# Altium PCB PCB.PcbDoc
Units mm, origin at the board's own origin, x right, y up, seen from the top; angles counter-clockwise.
Board outline 41 x 25.36 mm, 2 copper layers (TOP, BOTTOM), stack 1.586 mm thick; 36 components, 21 nets, 107 pads, 50 vias.
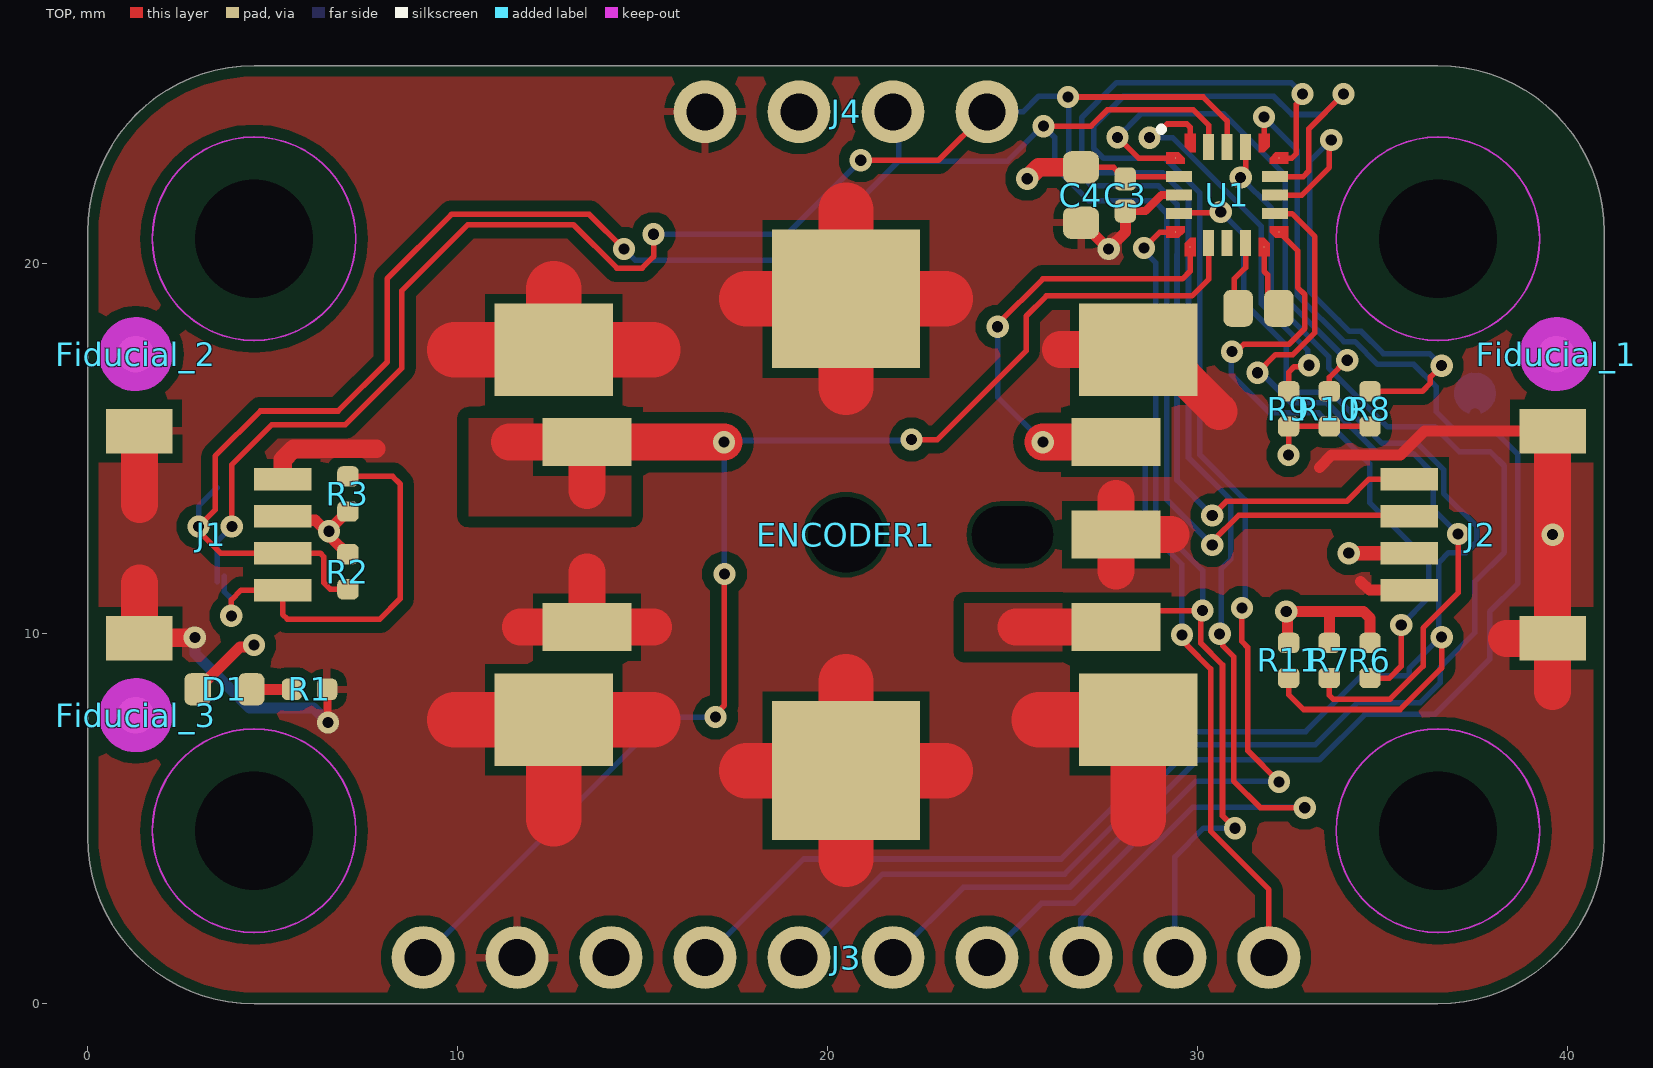
[diagram p0: TOP view]
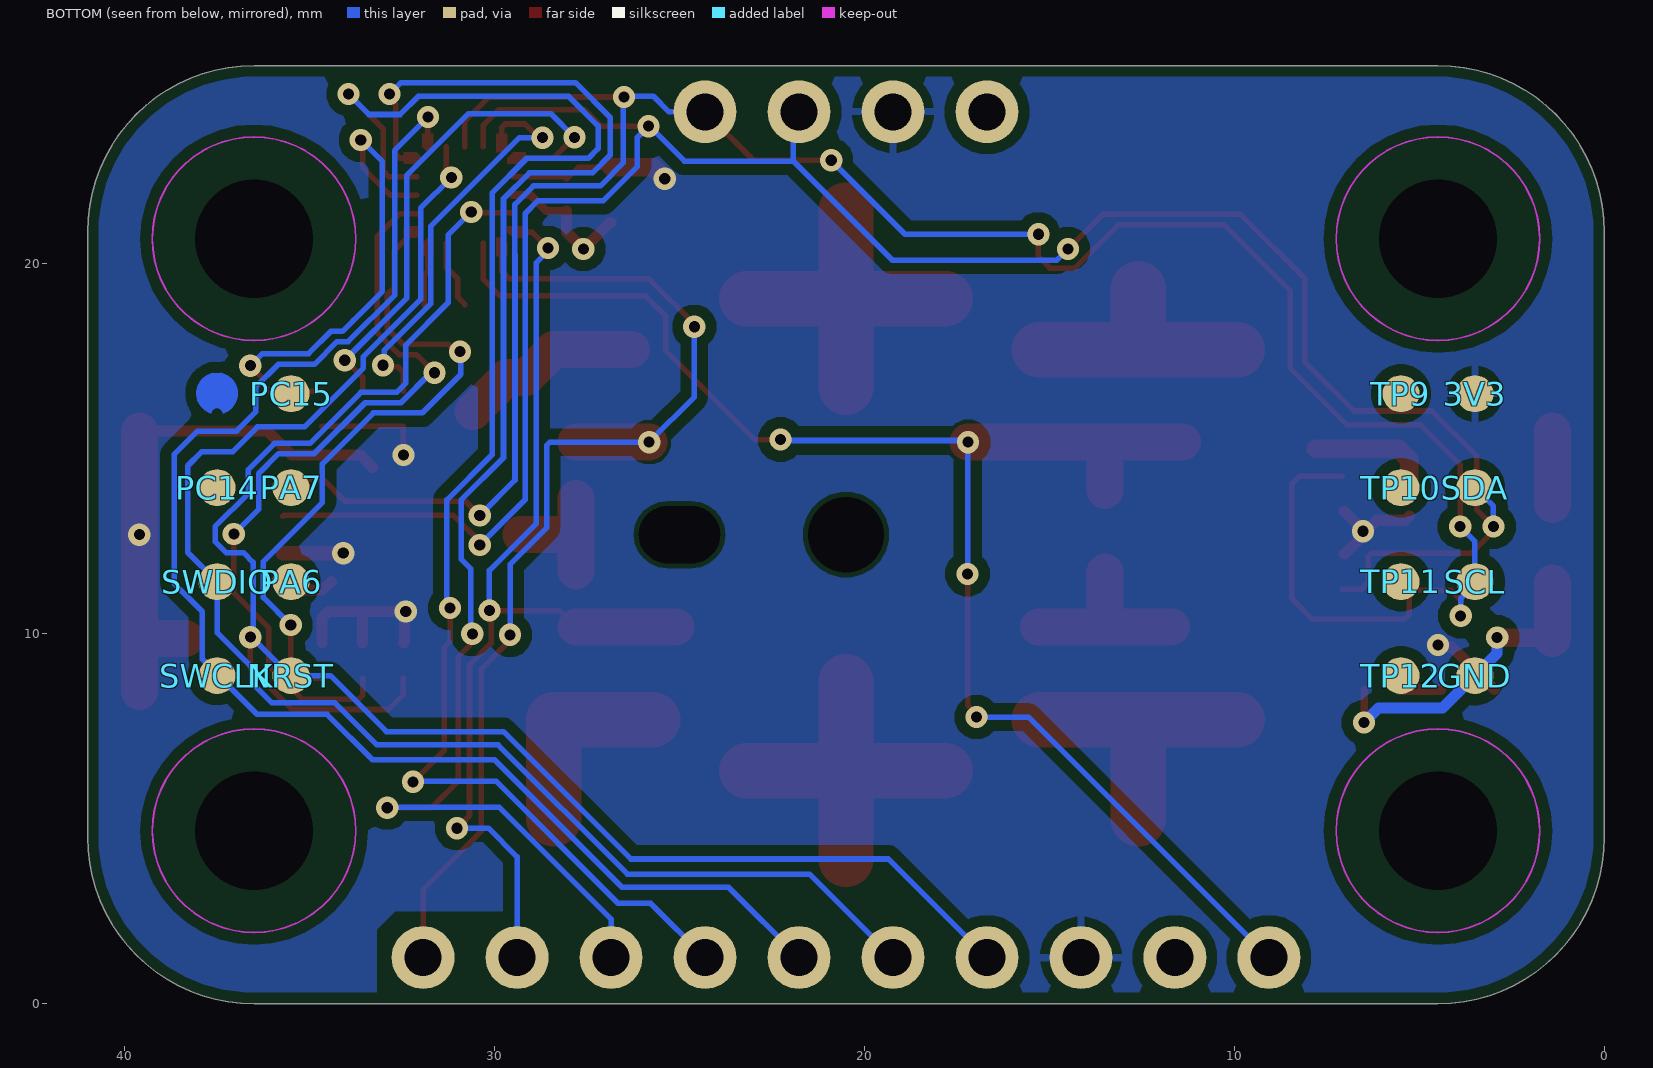
[diagram p1: BOTTOM view, seen from below]
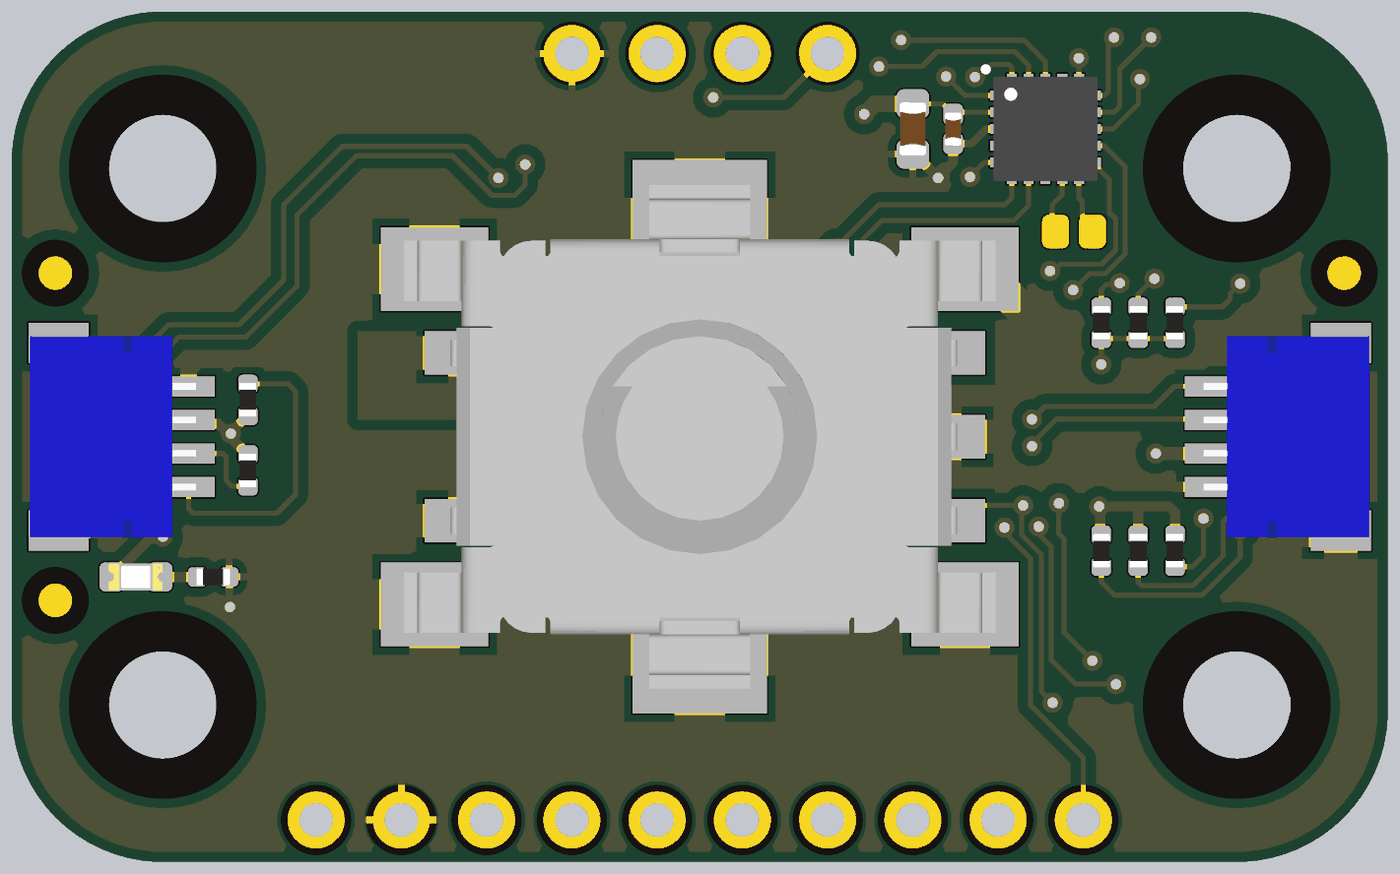
[diagram p2: 3D render of the assembled board from above, using the file's embedded part models]

## Layer stack, top to bottom
Top Solder: solder mask 0.01, Solder Resist, Dk 3.5
TOP: signal copper 0.018
Dielectric: core 1.55, FR-4, Dk 4.8
BOTTOM: signal copper 0.018
Bottom Solder: solder mask 0.01, Solder Resist, Dk 3.5

## Board outline
0,4.5 ccw(c4.5,4.5) 4.5,0 36.5,0 ccw(c36.5,4.5) 41,4.5 41,20.86 ccw(c36.5,20.86) 36.5,25.36 4.5,25.36 ccw(c4.5,20.86) 0,20.86

## Design rules (kind name [scope] priority, off if disabled: settings)
BoardOutlineClearance Version [(ObjectKind = 'Text') And (StringText = '.Version')] p1: gap=0 ignorepadtopadclearanceinfootprint=FALSE
BoardOutlineClearance Mousebites [(ObjectKind = 'Pad') And (Name = 'Free-MOUSEBITE')] p2: gap=0 ignorepadtopadclearanceinfootprint=FALSE
BoardOutlineClearance Silks [(OnLayer('Top Overlay') OR OnLayer('Bottom Overlay'))] p3: gap=0 ignorepadtopadclearanceinfootprint=FALSE
BoardOutlineClearance [All] p4: gap=0.3 ignorepadtopadclearanceinfootprint=FALSE
Clearance COPPER_0.3mm [All] p1: gap=0.127 ignorepadtopadclearanceinfootprint=FALSE except(0.3: Arc-Fill Arc-Poly Arc-Region Track-Fill Track-Poly Track-Region SMDPad-Fill SMDPad-Poly SMDPad-Region THPad-Fill THPad-Poly THPad-Region Via-Fill Via-Poly Via-Region Fill-Fill Fill-Poly Fill-Region Poly-Poly Poly-Region Region-Region)
Clearance "Generic clearance 0.15mm" [All] p2: gap=0.15 ignorepadtopadclearanceinfootprint=FALSE
ComponentClearance [All] p1: gap=0.2 collisioncheckmode=3 verticalgap=0 showdistances=TRUE
DiffPairsRouting USB [InDifferentialPairClass('USB')] p1: maxlimit=0.15 minlimit=0.15 mostfreqgap=0.15 toplayer_minwidth=0.15 toplayer_maxwidth=0.21 toplayer_prefwidth=0.2 bottomlayer_minwidth=0.15 bottomlayer_maxwidth=0.21 bottomlayer_prefwidth=0.2 impedanceprofiledriven=TRUE impedanceprofileid={E6B00C31-4C8E-439C-824F-D2B2CDC26F9C} impedanceprofilevalue=90.000000 maxuncoupledlength=12.7
Height [All] p1: minheight=0 maxheight=30 prefheight=12.7
HoleSize [All] p1: absolutevalues=TRUE maxlimit=30 minlimit=0.3 maxpercent=80.000 minpercent=20.000
HoleToHoleClearance [All] p1: gap=0.25 allowstackedmicrovias=FALSE
MinimumAnnularRing [All] p1: minimumring=0.15
PlaneConnect [All] p1: pad.planeconnectstyle=Relief pad.reliefexpansion=0.508 pad.reliefentries=4 pad.reliefconductorwidth=0.254 pad.reliefairgap=0.254 via.planeconnectstyle=Direct via.reliefexpansion=0.508 via.reliefentries=4 via.reliefconductorwidth=0.254 via.reliefairgap=0.254
PolygonConnect [All] p1: thpad.connectstyle=Relief thpad.reliefconductorwidth=0.2 thpad.reliefentries=4 thpad.polygonreliefangle="90 Angle" thpad.airgapwidth=0.254 smdpad.connectstyle=Relief smdpad.reliefconductorwidth=0.2 smdpad.reliefentries=4 smdpad.polygonreliefangle="90 Angle" smdpad.airgapwidth=0.254 via.connectstyle=Direct via.reliefconductorwidth=0.254 via.reliefentries=4 via.polygonreliefangle="90 Angle" via.airgapwidth=0.254
RoomDefinition TOP [InComponentClass('TOP')] p1: confinementstyle=ConfineIn formatcopy=TRUE lockcomponents=FALSE outline 42.8,3.6 51.5,3.6 51.5,18.3 42.8,18.3
RoutingVias StandardVias [All] p1: holewidth=0.3 width=0.6 viastyle="Through Hole" minholewidth=0.3 minwidth=0.6 maxholewidth=0.3 maxwidth=0.6
SMDToCorner [All] p1: distance=39370
SilkToSilkClearance [All] p1: silktosilkclearance=0.2
SilkToSolderMaskClearance [IsPad] p1: minsilkscreentomaskgap=0.15 clearancetoexposedcopper=TRUE
SolderMaskExpansion VIAtented [IsVia] p1: expansion=0.102 istentingtop=TRUE
SolderMaskExpansion [All] p2: expansion=0.05 istentingtop=FALSE
UnConnectedPin [All] p1:
UnRoutedNet [not WithinRoom('K36')] p1: checkbadconnections=TRUE
ViasUnderSMD [All] p1: allowed=FALSE
Width StandardTraces [All] p1: maxlimit=5 minlimit=0.15 preferedwidth=0.15 minimp=50.000000 maximp=50.000000 favimp=50.000000
21 further rules are at their usual default settings.

## Classes and differential pairs
component class TOP: 3V3 D1 ENCODER1 Fiducial_1 Fiducial_2 Fiducial_3 GND J1 J2 J3 J4 NRST PA6 PA7 PC14 PC15 R1 SCL SDA SWCLK SWDIO TP9 TP10 TP11 TP12
component class U_MICROCONTROLLER: C3 C4 R2 R3 R6 R7 R8 R9 R10 R11 U1

## Components (designator, comment, footprint, x,y, rotation, side; value= is the part's Value field where it differs from the comment)
3V3 "Test point 1.00mm" TP-1.00MM 3.5,16.49 r90 bottom
C3 "0402B104K160CT" CAP-0402 28.05,21.86 r270 top value=100nF
C4 "GRM188R61C475KAAJD" CAP-0603 26.85,21.86 r90 top value=4.7µF
D1 "HSMG-C190" LEDC1608X80N-AK 3.7,8.5 r180 top
ENCODER1 "PEC11J-9215F-S0015" PEC11J-9215F-S0015 20.5,12.68 r90 top
Fiducial_1 "Fiducial mark 1mm" "Fiducial mark 1mm-Footprint-1" 39.7,17.56 r270 top
Fiducial_2 "Fiducial mark 1mm" "Fiducial mark 1mm-Footprint-1" 1.3,17.56 r270 top
Fiducial_3 "Fiducial mark 1mm" "Fiducial mark 1mm-Footprint-1" 1.3,7.8 r270 top
GND "Test point 1.00mm" TP-1.00MM 3.5,8.87 r90 bottom
J1 "SM04B-SRSS-TB(LF)(SN)" SM04B-SRSS-TB(LF)(SN)-Footprint-1 3.337,12.68 r90 top locked
J2 "SM04B-SRSS-TB(LF)(SN)" SM04B-SRSS-TB(LF)(SN)-Footprint-1 37.663,12.68 r270 top locked
J3 "HEADER TH 2.54mm VERT. 1x010POS" "PIN HEADER 2.54mm VERT. 1x10POS" 20.5,1.25 r0 top
J4 "HEADER TH 2.54mm VERT. 1x004POS" "PIN HEADER 2.54mm VERT. 1x4POS-Footprint-1" 20.5,24.11 r0 top
NRST "Test point 1.00mm" TP-1.00MM 35.5,8.87 r180 bottom
PA6 "Test point 1.00mm" TP-1.00MM 35.5,11.41 r180 bottom
PA7 "Test point 1.00mm" TP-1.00MM 35.5,13.95 r180 bottom
PC14 "Test point 1.00mm" TP-1.00MM 37.5,13.95 r180 bottom
PC15 "Test point 1.00mm" TP-1.00MM 35.5,16.49 r180 bottom
R1 "CRCW04021K00FKEDC" RES-0402 6,8.5 r180 top value=1k
R2 "RC0402FR-074K7L" RES-0402 7.039,11.68 r90 top value=4.7k
R3 "RC0402FR-074K7L" RES-0402 7.039,13.78 r270 top value=4.7k
R6 "RC0402FR-074K7L" RES-0402 34.663,9.28 r270 top value=4.7k
R7 "RC0402FR-074K7L" RES-0402 33.563,9.28 r270 top value=4.7k
R8 "RC0402FR-074K7L" RES-0402 34.663,16.08 r90 top value=4.7k
R9 "RC0402FR-074K7L" RES-0402 32.463,16.08 r90 top value=4.7k
R10 "RC0402FR-074K7L" RES-0402 33.563,16.08 r90 top value=4.7k
R11 "RC0402FR-074K7L" RES-0402 32.463,9.28 r270 top value=4.7k
SCL "Test point 1.00mm" TP-1.00MM 3.5,11.41 r90 bottom
SDA "Test point 1.00mm" TP-1.00MM 3.5,13.95 r90 bottom
SWCLK "Test point 1.00mm" TP-1.00MM 37.5,8.87 r180 bottom
SWDIO "Test point 1.00mm" TP-1.00MM 37.5,11.41 r180 bottom
TP9 "Test point 1.00mm" TP-1.00MM 5.5,16.49 r0 bottom
TP10 "Test point 1.00mm" TP-1.00MM 5.5,13.95 r0 bottom
TP11 "Test point 1.00mm" TP-1.00MM 5.5,11.41 r0 bottom
TP12 "Test point 1.00mm" TP-1.00MM 5.5,8.87 r0 bottom
U1 "STM32C011F4U6TR" UFQFPN20 30.8,21.86 r0 top

## Footprints (in the part's own frame and the unit in brackets; to place one, negate y for a bottom-side part, rotate by r counter-clockwise, add the part's x,y. Pads: shape width x height; smd on the part's side, far side on the other; paste and mask are expansions set on the pad)
CAP-0402 [mm] "Chip Capacitor, 2-Leads, Body  0402 (in) 1005 (mm), IPC Medium Density"
  rrect52% 0.63x0.58 smd mask+0.05: 1(-0.435,0) 2(0.435,0)
  body extent -0.5,-0.25 0.5,0.25, height 0.5
CAP-0603 [mm] "Chip Capacitor, Body 0603 imperial,1.6x0.8mm, IPC High Density"
  rrect51% 0.87x0.97 smd mask+0.05: 1(-0.75,0) 2(0.75,0)
  body extent -0.8,-0.4 0.8,0.4, height 0.8
"Fiducial mark 1mm-Footprint-1" [mm]
  round 1 smd paste-10 mask+0.5: 1(0,0)
  TOP keep-out circle w1: c0,0 r0.5
LEDC1608X80N-AK [mm]
  rrect50% 0.72x0.87 smd: A(0.725,0) C(-0.725,0)
  body extent -0.8,-0.4 0.8,0.4, height 0.79
PEC11J-9215F-S0015 [mm]
  rect 1.3x2.4 smd: A(-2.5,-7.3) B(2.5,-7.3) C(0,-7.3) D(-2.5,7) E(2.5,7)
  rect 3.75x4 smd: FIXING(-6.375,0) FIXING(6.375,0)
  rect 2.5x3.2 smd: FIXING(-5,7.9) FIXING(-5,-7.9) FIXING(5,7.9) FIXING(5,-7.9)
  round 0.5 hole 2.05 unplated: PLASTIC(0,0)
  round 0.5 hole 1.55 slot 2.2 at 90 deg unplated: PLASTIC(0,-4.5)
  body extent -7.51,-8.82 7.51,8.82, height 19.52
"PIN HEADER 2.54mm VERT. 1x4POS-Footprint-1" [mm]
  round 1.7 hole 1 mask+0.1: 1(-3.81,0) 2(-1.27,0) 3(1.27,0) 4(3.81,0)
"PIN HEADER 2.54mm VERT. 1x10POS" [mm]
  round 1.7 hole 1 mask+0.2: 1(-11.43,0) 2(-8.89,0) 3(-6.35,0) 4(-3.81,0) 5(-1.27,0) 6(1.27,0) 7(3.81,0) 8(6.35,0) 9(8.89,0) 10(11.43,0)
RES-0402 [mm] "Chip Resistor, 2-Leads, Body  0402 (in) 1005 (mm), IPC Medium Density"
  rrect51% 0.55x0.58 smd mask+0.05: 1(-0.475,0) 2(0.475,0)
  body extent -0.5,-0.25 0.5,0.25, height 0.34
SM04B-SRSS-TB(LF)(SN)-Footprint-1 [mm]
  rect 0.6x1.55 smd mask+0.05: 1(1.5,-1.937) 2(0.5,-1.937) 3(-0.5,-1.937) 4(-1.5,-1.937)
  rect 1.2x1.8 smd mask+0.05: FIX(-2.8,1.938) FIX(2.8,1.938)
  body extent -3,-2.16 3,2.8, height 2.98
TP-1.00MM [mm]
  rrect100% 1x1 smd paste-2.54: X(0,0)
UFQFPN20 [mm] "QFN, 20-Leads, Body 3.00x3.00mm, Pitch 0.50mm, IPC Medium Density"
  round 0.025 smd mask+0.05: 1(-1.4,1) 5(-1.4,-1) 6(-1,-1.4) 10(1,-1.4) 11(1.4,-1) 15(1.4,1) 16(1,1.4) 20(-1,1.4)
  rect 0.7x0.3 smd mask+0.05: 2(-1.3,0.5) 3(-1.3,0) 4(-1.3,-0.5) 12(1.3,-0.5) 13(1.3,0) 14(1.3,0.5)
  rect 0.3x0.7 smd mask+0.05: 7(-0.5,-1.3) 8(0,-1.3) 9(0.5,-1.3) 17(0.5,1.3) 18(0,1.3) 19(-0.5,1.3)
  TOP region: -1.3,-1.15 -1.15,-1 -1.15,-0.85 -1.65,-0.85 -1.65,-1.15
  TOP region: -0.85,-1.65 -1.15,-1.65 -1.15,-1.3 -1,-1.15 -0.85,-1.15
  TOP region: 1.15,-1.65 0.85,-1.65 0.85,-1.15 1,-1.15 1.15,-1.3
  TOP region: 1.65,1.15 1.65,0.85 1.15,0.85 1.15,1 1.3,1.15
  TOP region: 1,1.15 0.85,1.15 0.85,1.65 1.15,1.65 1.15,1.3
  TOP region: -1.15,1 -1.15,0.85 -1.65,0.85 -1.65,1.15 -1.3,1.15
  TOP region: -1.15,1.3 -1,1.15 -0.85,1.15 -0.85,1.65 -1.15,1.65
  TOP region: 1.65,-0.85 1.65,-1.15 1.3,-1.15 1.15,-1 1.15,-0.85
  silkscreen extent -1.8,1.75 -1.75,1.8, body extent -1.55,-1.55 1.55,1.55, height 0.6

## Part data
3V3 GND NRST PA6 PA7 PC14 PC15 SCL SDA SWCLK SWDIO TP9 TP10 TP11 TP12: library part UT0013-A.6, Manufacturer="This is not a component", Code Arduino="This is not a component", Design Item ID=CMP-018-0005-A.3, Part Number="This is not a component", Pin Count=1, Source=ut.SchLib
C3: library part C0012-A.15, "CAP CHIP 0402 100nF 10% 16V X7R", Case Code (Imperial)=0402, Dielectric=X7R, Manufacturer=Walsin, Tolerance=10%, Voltage=16V, Code Arduino=0132, Part Number=0402B104K160CT, Technology=Ceramic
C4: library part C0054-A.16, "CAP CHIP 0603 4.7uF 10% 16V X5R", Case Code (Imperial)=0603, Dielectric=X5R, Manufacturer=Murata, Manufacturer 3="Samsung Electro-Mechanics", Part number 2=GRM188R61C475KE11D, Part number 3=CL10A475KO8NNNC, Tolerance=10%, Voltage=16V, Code Arduino=A5072, Manufacturer 2=Murata, Part Number=GRM188R61C475KAAJD, Technology=Ceramic
D1: library part L0009-A.5, "LED SMD 0603 GREEN/568 15mcd 120^", Manufacturer=Broadcom, Code Arduino=2204, Part Number=HSMG-C190, Pin Count=2
ENCODER1: library part S0054-A.2, "ENCODER 2b quadrature, 15PPR, 30 detents, shaft 15mm D-Cut, switch 350+-100gf, SMD 15x18x20mm", Manufacturer=Bourns, Code Arduino=S0054, Part Number=PEC11J-9215F-S0015
Fiducial_1 Fiducial_2 Fiducial_3: library part UT0023-A.7, "Fiducial mark 1mm clearance 2mm"
J1 J2: library part J0005-A.2, "CONN JST 4POS SIDE 1MM TIN QWIIC", Manufacturer=JST, Code Arduino=J0005, Part Number=SM04B-SRSS-TB(LF)(SN)
J3: library part J0169-A.8, Code Arduino=J0169
J4: library part J0162-A.5, Code Arduino=J0162
R1: library part R0007-A.24, "RES CHIP 0402 1k 1% 1/16W", Case Code (Imperial)=0402, Manufacturer=Vishay, Power=62.5mW, Temperature Coefficient=100ppm, Tolerance=1%, Code Arduino=0140, Part Number=CRCW04021K00FKEDC, Technology="Thick film"
R2 R3 R6 R7 R8 R9 R10 R11: library part R0013-A.24, "RES CHIP 0402 4k7 1% 1/16W", Case Code (Imperial)=0402, Manufacturer=YAGEO, Power=62.5mW, Temperature Coefficient=200ppm, Tolerance=1%, Code Arduino=2196, Part Number=RC0402FR-074K7L, Technology="Thick film"
U1: library part U0363-A.3, "IC Cortex M0, 32b MCU, 32KB Flash, 6KB RAM, VDD 2-3.6V, -40°C to 85°C, QFN20 3x3mm", Manufacturer="ST Microelectronics", Code Arduino=U0363, Part Number=STM32C011F4U6TR

## Free pads (board coordinates)
  rrect50% 0.8x1 smd paste-2539.97: 3V10(31.1,18.8) 3V10(32.2,18.8)
  round 3 hole 3.2 unplated paste-2539.97 mask+1.3: MH(4.5,4.68) MH(4.5,20.68) MH(36.5,4.68) MH(36.5,20.68)

## Via types
v1: diameter 0.6, hole 0.3, TOP to BOTTOM, tented both sides, 50 vias

## Nets (pads, with @x,y where several pads share a name; then routed paths per layer and width w, separated by ;. In a path a pad name is that pad's centre, name@x,y a point inside that pad or via, vN(x,y) a via of type N, cw(c..) or ccw(c..) an arc to the next point about the centre after c; other vN are vias at no path point)
+3V3: 3V3.X C3.1 C4.2 D1.A J1.2 J2.2 J3.3 J4.2 R2.2 R3.2 R6.1 R7.1 R8.1 R9.1 R10.1 R11.1 U1.2 | length 18.8
  TOP w0.15: C4.2 27.735,22.61 C3.1 28.115,22.36 U1.2 ; v1(32.463,14.837) R9.1 R10.1 R8.1
  TOP w0.3: D1.A 4.118,9.643 4.443,9.643 v1(4.5,9.7) ; J1.2 5.384,13.07 6.154,13.07 6.453,12.772 v1(6.53,12.772) ; R2.2 7.024,12.155 6.587,12.592 6.587,12.714 v1(6.53,12.772) ; R3.2 7.024,13.305 6.608,12.889 6.608,12.85 v1(6.53,12.772) ; R11.1 32.432,9.787 32.432,10.568 v1(32.4,10.6) 34.487,10.6 34.663,10.424 R6.1 ; 33.514,10.6 33.563,10.551 R7.1
  TOP w0.4: v1(34.088,12.18) J2.2
  TOP w0.5: v1(25.4,22.3) 25.71,22.61 C4.2
GND: C3.2 C4.1 ENCODER1.C ENCODER1.D ENCODER1.FIXING GND.X J1.1 J1.FIX J2.1 J2.FIX J3.2 J4.1 R1.1 U1.3 | length 88.4
  TOP w0.2: R1.1 6.488,8.488 6.488,7.612 v1(6.5,7.6)
  TOP w0.22: C3.2 28.592,21.425 29.027,21.86 U1.3
  TOP w0.3: C4.1 26.895,21.11 v1@27.6,20.405 ; v1(27.6,20.4) v1@27.6,20.405 ; C3.2 28.05,20.866 27.6,20.416 v1@27.6,20.405 ; 33.3,14.5 33.628,14.828 35.486,14.828 36.138,15.48 J2.FIX@39.601,15.48 ; 34.406,11.419 34.645,11.18 J2.1
  TOP w0.5: J1.FIX@1.399,9.88 1.419,9.9 v1(2.9,9.9) ; J1.1 5.275,14.707 5.567,15 7.8,15
  TOP w1: J1.FIX@1.399,9.88 1.399,11.379 ; 1.399,13.499 J1.FIX@1.399,15.48 ; 11.7,10.18 ENCODER1.D ; 13.5,11.671 ENCODER1.D ; 15.3,10.18 ENCODER1.D ; 26.3,17.68 28.4,17.68 29.15,16.93 29.661,16.93 30.581,16.01 ; 27.8,11.7 ENCODER1.C ; 27.8,13.66 ENCODER1.C ; 29.291,12.68 ENCODER1.C ; 38.353,9.88 J2.FIX@39.601,9.88 ; 39.601,8.443 J2.FIX@39.601,9.88 ; J2.FIX@39.601,15.48 J2.FIX@39.601,9.88
  TOP w1.5: 9.92,7.68 ENCODER1.FIXING@12.6,7.68 ; 9.92,17.68 12.6,17.68 15.28,17.68 ; ENCODER1.FIXING@12.594,17.686 12.594,19.328 ; 12.6,5 ENCODER1.FIXING@12.6,7.68 ; 15.28,7.68 ENCODER1.FIXING@12.6,7.68 ; 17.82,6.305 ENCODER1.FIXING@20.5,6.305 ; 17.82,19.055 ENCODER1.FIXING@20.5,19.055 ; 20.5,3.91 ENCODER1.FIXING@20.5,6.305 ; 20.5,8.7 ENCODER1.FIXING@20.5,6.305 ; 20.5,16.66 ENCODER1.FIXING@20.5,19.055 ; 20.5,21.45 ENCODER1.FIXING@20.5,19.055 ; 23.18,6.305 ENCODER1.FIXING@20.5,6.305 ; 23.18,19.055 ENCODER1.FIXING@20.5,19.055 ; 25.72,7.68 28.4,7.68 28.4,5
  BOTTOM w0.3: v1(2.9,9.9) 2.9,9.47 GND.X 4.372,7.998 6.102,7.998 v1(6.5,7.6)
  other v1: 39.601,12.68
NetD1_C: D1.C R1.2 | length 1.1
  TOP w0.3: D1.C R1.2
NetU1_8: U1.8
NetU1_9: pad.3V10@31.1,18.8 U1.9 | length 1.9
  TOP w0.15: pad.3V10@30.8,18.9 31,19.1 31,19.6 31.3,19.9 U1.9
NetU1_10: pad.3V10@32.2,18.8 U1.10 | length 1.6
  TOP w0.15: U1.10 31.8,19.8 31.9,19.7 pad.3V10@31.9,18.9
PA0_1: ENCODER1.A J3.9 U1.5 | length 27.7
  TOP w0.15: ENCODER1.A 28.249,10.629 v1(30.137,10.629) 30.091,10.583 30.091,9.745 30.677,9.159 30.677,5.083 v1(31.014,4.746) ; v1(28.552,20.428) 28.984,20.86 U1.5
  TOP w1: 25.1,10.18 ENCODER1.A
  BOTTOM w0.15: v1(28.552,20.428) 28.552,20.353 28.87,20.035 28.87,12.98 30.137,11.713 v1(30.137,10.629) ; J3.9 29.39,3.97 30.166,4.746 v1(31.014,4.746)
PA1_1: ENCODER1.B J3.10 U1.6 | length 30.2
  TOP w0.15: v1(24.6,18.3) 24.6,18.372 25.823,19.595 29.595,19.595 29.8,19.8 U1.6 ; v1(29.579,9.973) 29.579,9.851 29.727,9.703 29.727,9.678 30.353,9.051 30.353,4.667 31.93,3.09 J3.10
  TOP w1: v1(25.82,15.18) ENCODER1.B
  BOTTOM w0.15: v1(24.6,18.3) 24.6,16.4 v1(25.82,15.18) 28.505,15.18 28.593,15.092 28.593,12.866 29.579,11.88 v1(29.579,9.973)
PA2_1: ENCODER1.E J3.1 U1.7 | length 41.7
  TOP w0.15: v1(16.97,7.75) 16.97,7.823 17.21,8.063 v1@17.21,11.613 ; v1(22.27,15.25) 22.97,15.25 25.37,17.65 25.37,18.584 25.918,19.132 29.852,19.132 30.3,19.58 U1.7
  TOP w1: 11.4,15.18 ENCODER1.E ; 13.5,13.88 ENCODER1.E ; v1(17.2,15.18) ENCODER1.E
  BOTTOM w0.15: J3.1 15.57,7.75 v1(16.97,7.75) ; v1(17.216,11.619) 17.208,11.627 17.208,15.172 v1(17.2,15.18) 17.245,15.225 22.245,15.225 v1(22.27,15.25)
PA6_2: R6.2 U1.11 | length 17.9
  TOP w0.15: v1(30.937,17.626) 31.053,17.626 31.249,17.823 32.466,17.823 32.899,18.255 32.899,19.17 32.705,19.364 32.705,20.355 U1.11 ; R6.2 35.184,8.805 35.508,9.128 v1(35.508,10.241)
  BOTTOM w0.15: v1(30.937,17.626) 30.913,17.602 30.913,17.01 31.953,15.97 33.276,15.97 34.652,14.594 34.652,13.548 36.246,11.954 36.246,10.979 v1(35.508,10.241)
PA7_2: R7.2 U1.12 | length 21.1
  TOP w0.15: v1(31.624,17.056) 32.113,17.546 32.581,17.546 33.176,18.141 33.176,20.734 32.55,21.36 U1.12 ; R7.2 33.563,8.337 33.665,8.234 35.203,8.234 36.098,9.129 36.098,10.158 37.054,11.114 37.054,12.689 v1(37.046,12.697)
  BOTTOM w0.15: v1(31.624,17.056) 31.723,17.056 32.533,16.247 33.495,16.247 34.873,14.869 35.835,14.869 36.378,14.326 36.378,13.365 v1(37.046,12.697)
PA8_2: R8.2 U1.13 | length 13.6
  TOP w0.15: U1.13 32.822,21.86 33.567,22.605 33.567,23.3 v1(33.615,23.347) ; R8.2 36.075,16.555 36.295,16.775 36.295,16.941 v1(36.601,17.247)
  BOTTOM w0.15: v1(33.615,23.347) 33.029,22.762 33.029,19.258 33.816,18.471 34.114,18.173 34.427,18.173 35.027,17.573 36.275,17.573 v1(36.601,17.247)
PA9_USART1_TX_1: J3.7 U1.14 | length 41.7
  TOP w0.15: v1(31.2,10.7) 31.2,10.31 31.198,10.308 31.198,9.794 31.358,9.633 31.358,6.842 v1(32.2,6) ; U1.14 32.86,22.36 33.008,22.508 33.008,23.648 v1(33.95,24.59)
  BOTTOM w0.15: J3.7 25.778,2.718 26.66,2.718 29.952,6.01 32.19,6.01 v1(32.2,6) ; v1(31.2,10.7) 31.286,10.786 31.286,13.622 30.067,14.841 30.067,21.917 29.13,22.854 27.463,22.854 27.199,23.118 27.199,23.73 27.998,24.53 32.058,24.53 32.551,24.037 33.397,24.037 v1(33.95,24.59)
PA10_USART1_RX_1: J3.8 U1.15 | length 40.1
  TOP w0.15: v1(30.6,10) 30.686,9.914 30.686,9.676 30.978,9.384 30.978,6.022 31.7,5.3 v1(32.9,5.3) ; U1.15 32.554,22.86 32.671,22.977 32.671,24.312 32.841,24.482 v1(32.841,24.591)
  BOTTOM w0.15: J3.8 26.85,2.289 29.871,5.31 32.89,5.31 v1(32.9,5.3) ; v1(30.6,10) 30.639,10.039 30.639,11.756 30.902,12.019 30.902,13.614 29.757,14.759 29.757,21.759 29.056,22.46 27.35,22.46 26.871,22.939 26.871,23.956 27.816,24.9 32.531,24.9 v1(32.841,24.591)
PA13_SWDIO_1: J3.6 SWCLK.X U1.16 | length 39.4
  TOP w0.15: v1@31.744,24.019 v1(31.795,23.968) 31.8,23.963 U1.16
  BOTTOM w0.15: J3.6 23.671,3.151 26.553,3.151 29.998,6.596 33.296,6.596 34.523,7.823 36.413,7.823 37.48,8.89 37.48,8.899 37.9,9.319 37.9,10.6 38.662,11.362 38.662,14.848 38.029,15.481 36.974,15.481 36.456,16 36.456,16.672 35.846,17.282 34.869,17.282 34.255,17.896 33.955,17.896 32.702,19.149 32.702,23.061 v1(31.795,23.968)
PA14_SWCLK_BOOT0_1: J3.5 SWDIO.X U1.17 | length 39.8
  TOP w0.15: v1(31.167,22.336) 31.167,22.429 31.3,22.562 U1.17
  BOTTOM w0.15: J3.5 21.487,3.507 26.409,3.507 29.902,7 33.181,7 34.324,8.143 36.027,8.143 36.557,8.673 36.557,9.089 37.5,10.032 SWDIO.X 38.291,12.201 38.291,14.543 37.907,14.927 37.073,14.927 36.408,15.592 35.14,15.592 33.545,17.186 33.545,17.491 31.998,19.038 31.998,21.506 v1(31.167,22.336)
PC14_2: R9.2 U1.20 | length 11.1
  TOP w0.15: v1(28.7,23.41) 28.808,23.41 29.178,23.781 29.712,23.781 29.8,23.693 U1.20 ; R9.2 32.463,17.068 32.614,17.219 32.973,17.219 v1(33.014,17.259)
  BOTTOM w0.15: v1(28.7,23.41) 29.33,23.41 31.721,21.02 31.721,18.924 32.985,17.659 v1@32.985,17.288
PC15_2: R10.2 U1.1 | length 14
  TOP w0.15: v1@27.85,23.42 28.41,22.86 U1.1 ; R10.2 33.563,16.93 34.027,17.394 v1(34.047,17.394)
  BOTTOM w0.15: v1(27.84,23.42) 28.48,24.06 30.698,24.06 32.375,22.383 32.375,19.066 v1(34.047,17.394)
PF2_N\R\S\T\_1: J3.4 NRST.X R11.2 U1.4 | length 47
  TOP w0.15: U1.4 29.52,21.38 30.61,21.38 v1(30.63,21.4) ; R11.2 32.463,8.359 32.866,7.955 35.479,7.955 36.6,9.076 v1(36.6,9.91)
  BOTTOM w0.15: J3.4 19.354,3.914 26.316,3.914 29.761,7.359 32.923,7.359 34.434,8.87 NRST.X 35.722,8.87 35.722,9.062 36.57,9.91 v1(36.6,9.91) 36.523,9.987 36.523,11.932 36.786,12.195 37.254,12.195 37.553,12.493 37.553,12.901 36.655,13.798 36.655,14.27 36.655,14.441 35.95,15.146 34.988,15.146 33.61,16.524 32.647,16.524 32.396,16.776 32.396,17.805 31.252,18.948 31.252,20.778 v1(30.63,21.4)
SCL_1: J1.4 J2.4 J4.4 R3.1 SCL.X U1.18 | length 69.3
  TOP w0.15: v1(3.886,10.486) 3.886,10.916 4.15,11.18 J1.4 5.275,10.525 5.4,10.4 7.9,10.4 8.452,10.952 8.452,14.048 8.245,14.255 R3.1@7.089,14.255 ; v1(3.9,12.9) 3.9,14.573 4.976,15.649 6.963,15.649 8.496,17.182 8.496,19.278 10.28,21.062 13.128,21.062 14.305,19.885 14.988,19.885 15.302,20.199 15.302,20.798 v1(15.3,20.8) ; v1(20.9,22.8) 23,22.8 J4.4 ; v1(26.5,24.51) 30.151,24.51 30.8,23.861 U1.18 ; v1(30.4,13.2) 30.783,13.583 34.041,13.583 34.638,14.18 J2.4
  BOTTOM w0.15: SCL.X 3.5,12.5 v1(3.9,12.9) ; SCL.X@3.694,11.557 3.694,11.14 3.886,10.948 v1(3.886,10.486) ; v1(15.3,20.8) 18.9,20.8 v1(20.9,22.8) ; J4.4 25.288,24.11 25.71,24.532 26.478,24.532 v1(26.5,24.51) 26.516,24.494 26.516,22.735 27.141,22.11 28.947,22.11 29.452,21.605 29.452,20.245 29.447,20.24 29.447,14.153 v1(30.4,13.2)
SDA_1: J1.3 J2.3 J4.3 R2.1 SDA.X U1.19 | length 63.8
  TOP w0.15: R2.1@7.089,11.205 6.564,11.205 6.49,11.28 6.389,11.38 6.389,12.08 6.289,12.18 J1.3 3.598,12.18 3.186,12.592 3,12.778 v1(3,12.9) 3.448,13.348 3.448,14.801 4.67,16.022 6.772,16.022 8.1,17.351 8.1,19.601 9.838,21.339 13.561,21.339 v1(14.5,20.4) ; v1(25.838,23.722) 27.122,23.722 27.56,24.16 29.888,24.16 30.3,23.748 U1.19 ; v1(30.4,12.4) 30.4,12.49 31.12,13.21 35.696,13.21 J2.3
  BOTTOM w0.15: v1(3,12.9) 3,13.45 SDA.X ; v1(14.5,20.4) 14.8,20.1 19.25,20.1 21.926,22.776 ; J4.3 21.926,23.954 21.926,22.776 ; v1(30.4,12.4) 29.17,13.63 29.17,21.359 28.819,21.71 27.058,21.71 26.138,22.629 26.138,23.422 v1(25.838,23.722) 25.814,23.722 24.869,22.776 21.926,22.776
pads on no net: ENCODER1.PLASTIC Fiducial_1.1 Fiducial_2.1 Fiducial_3.1 PA6.X PA7.X PC14.X PC15.X TP9.X TP10.X TP11.X TP12.X

## Polygon pours and split planes (outlines as drawn)
GND on TOP "NONET_L04_P-001" (solid, remove dead copper, pour order 6): 0,4.5 ccw(c4.5,4.5) 4.5,0 36.5,0 ccw(c36.5,4.5) 41,4.5 41,20.86 ccw(c36.5,20.86) 36.5,25.36 4.5,25.36 ccw(c4.5,20.86) 0,20.86
PA0_1 on TOP "NONET_L04_P-001" (solid, remove dead copper, pour order 0): 29,10.83 29,9.53 23.7,9.53 23.7,10.83
PA2_1 on TOP "NONET_L04_P-001" (solid, remove dead copper, pour order 1): 14.7,15.83 14.7,13.18 10.3,13.18 10.3,15.83
GND on TOP "NONET_L04_P-001" (solid, remove dead copper, pour order 2): 0,25.36 0,0 3.2,0 3.2,25.36
GND on TOP "NONET_L04_P-001" (solid, remove dead copper, pour order 5): 41,25.36 41,0 37.8,0 37.8,25.36
+3V3 on BOTTOM "NONET_L04_P-001" (solid, remove dead copper, pour order 3): 0,4.5 ccw(c4.5,4.5) 4.5,0 36.5,0 ccw(c36.5,4.5) 41,4.5 41,20.86 ccw(c36.5,20.86) 36.5,25.36 4.5,25.36 ccw(c4.5,20.86) 0,20.86
GND on BOTTOM "NONET_L04_P-001" (solid, remove dead copper, pour order 4): 41,25.36 41,0 33.181,0 33.181,2 32.681,2.5 29.6,2.5 29.6,25.36

## Keep-outs
Keep-Out Layer:
  circle w0.05: c36.5,4.68 r2.75
  circle w0.05: c36.5,20.68 r2.75
  circle w0.05: c4.5,4.68 r2.75
  circle w0.05: c4.5,20.68 r2.75

## Other copper
BOTTOM:
  region: 441 vertices and 0 holes, not listed, extent 36.945,15.962 38.056,17.054

## Silkscreen, mask and mechanical layers (free items; w line width, h text height)
Route Tool Path:
  lines w2: -1,8.498 -1,16.86 ; 42,4.5 cw(c36.5,4.5) 36.5,-1 ; 42,8.498 42,16.86 ; -1,4.498 cw(c0,4.5) -1,4.5 ccw(c4.5,4.5) -1,4.498 ; -1,4.498 ccw(c4.5,4.5) 4.498,-1 ; -1,20.86 cw(c4.5,20.86) 4.5,26.36 ; -1,20.86 -1,20.86 ; 4.498,-1 ccw(c4.5,0) 4.5,-1 ; 4.498,-1 ccw(c4.5,4.5) 4.5,-1 ; 4.5,-1 36.5,-1 ; 4.5,26.36 4.5,26.36 ; 4.5,26.36 36.5,26.36 ; 36.5,-1 36.5,-1 ; 36.5,26.36 cw(c36.5,25.36) 36.502,26.36 ; 36.5,26.36 cw(c36.5,20.86) 36.502,26.36 ; 36.502,26.36 cw(c36.5,20.86) 42,20.863 ; 42,20.863 cw(c36.5,20.86) 42,20.86 ccw(c41,20.86) 42,20.863
Mechanical 66:
  circle w0.05: c36.5,4.68 r2.85
  circle w0.05: c36.5,20.68 r2.85
  circle w0.05: c4.5,20.68 r2.85
  circle w0.05: c4.5,4.68 r2.85